# Altium PCB PCB1.PcbDoc (part 1 of 10)
Units mm, origin at the board's own origin, x right, y up, seen from the top; angles counter-clockwise.
Board outline 171.83 x 244.04 mm, 2 copper layers (Top Layer, Bottom Layer); 100 components, 186 nets, 878 pads, 221 vias.
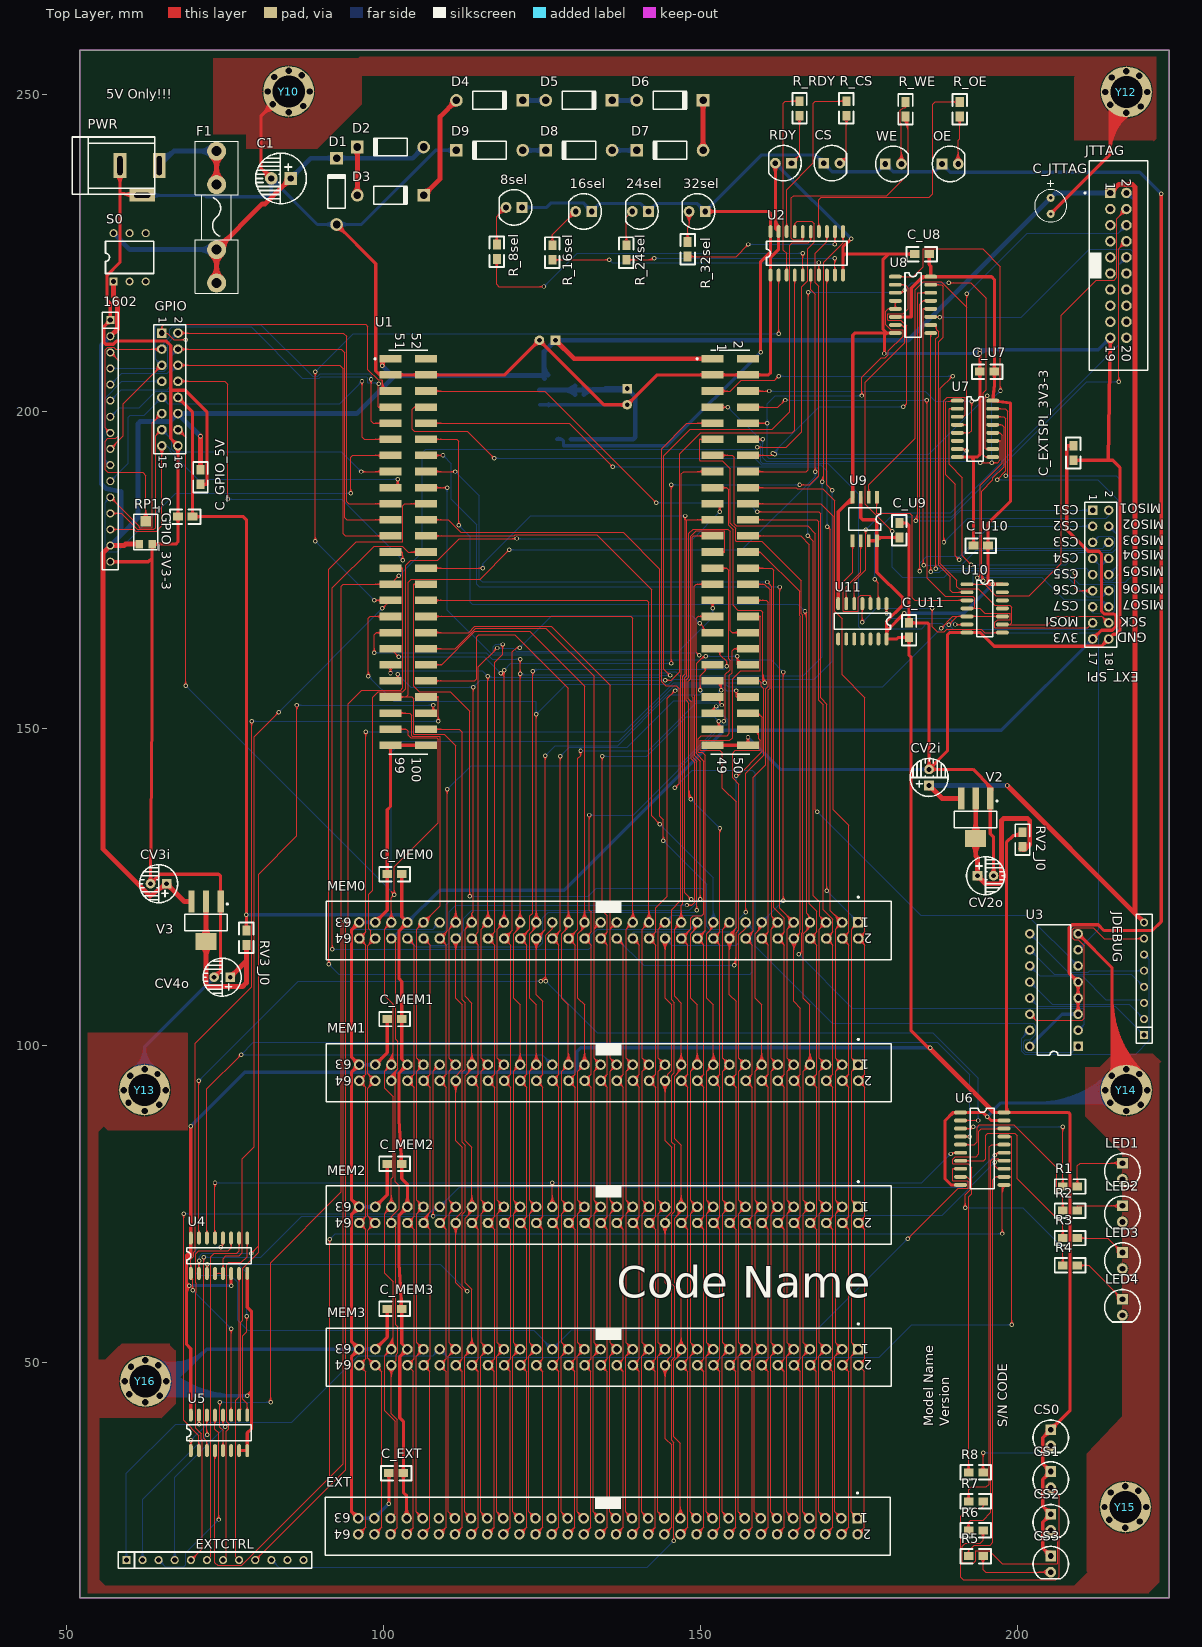
[diagram p0: Top Layer view]
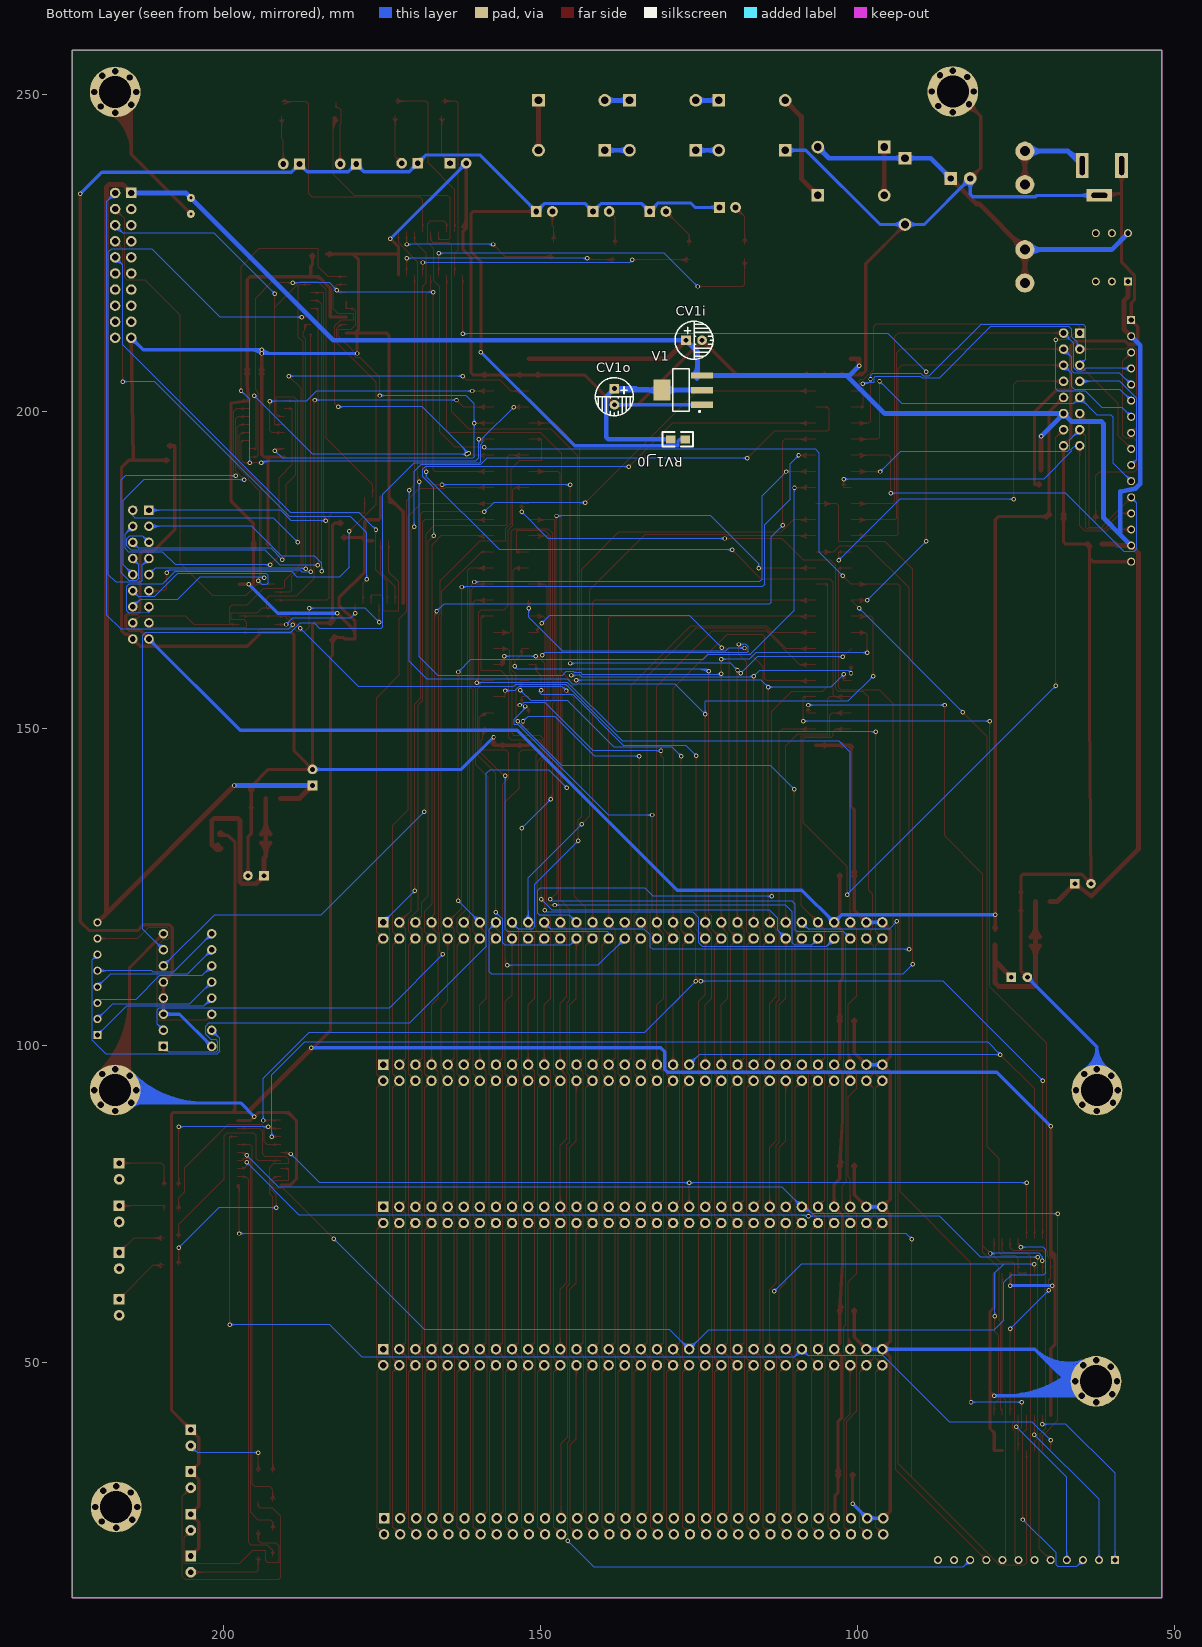
[diagram p1: Bottom Layer view, seen from below]

## Layer stack, top to bottom
Top Layer: signal copper 0.0356
Dielectric: dielectric 0.32, FR-4, Dk 4.8
Bottom Layer: signal copper 0.0356

## Board outline
52.07,256.921 223.901,256.921 223.901,12.885 52.07,12.885

## Design rules (kind name [scope] priority, off if disabled: settings)
Clearance [All] p1: gap=0.127
ComponentClearance [All] p1: gap=0.254 collisioncheckmode=3 verticalgap=0.254
HoleSize [All] p1: absolutevalues=TRUE maxlimit=15 minlimit=0.025 maxpercent=80.000 minpercent=20.000
PolygonConnect [All] p1: connectstyle=Relief reliefconductorwidth=0.254 reliefentries=4 polygonreliefangle="90 Angle"
RoutingVias [All] p1: holewidth=0.4 width=0.7 viastyle="Through Hole" minholewidth=0.4 minwidth=0.7 maxholewidth=0.4 maxwidth=0.7
SMDToCorner [All] p1: distance=150000
SolderMaskExpansion [All] p1: expansion=0.102
TestPointUsage [All] p1: valid=0 allowmultiple=FALSE
Testpoint [All] p1: side=15 testpointundercomponent=TRUE minsize=1.016 maxsize=2.54 preferedsize=1.524 minholesize=0 maxholesize=1.016 preferedholesize=0.813 testpointgrid=0.025 style=1023 order=0123456789
Width Width_2 [(InNet('3V3-1') OR InNet('3V3-2') OR InNet('3V3-3'))] p1: maxlimit=0.508 minlimit=0.254 preferedwidth=0.508
Width Width_1 [InNet('NetD2_2') OR InNet('NetD3_2') OR InNet('NetD4_2') OR InNet('NetD5_2') OR InNet('NetD6_2') OR InNet('NetD7_2') OR InNet('NetD8_2') OR InNet('NetF1_2') OR InNet('NetC1_1') OR InNet('NetCV1o_1') OR InNet('NetCV2o_1') OR InNet('NetCV4o_1')] p2: maxlimit=0.762 minlimit=0.254 preferedwidth=0.762
Width Width_PWR5 [InNet('+5')] p3: maxlimit=0.762 minlimit=0.254 preferedwidth=0.762
Width Width_GND [InNet('GND')] p4: maxlimit=5 minlimit=0.152 preferedwidth=0.508
Width [All] p5: maxlimit=0.508 minlimit=0.152 preferedwidth=0.152
17 further rules are at their usual default settings.

## Classes and differential pairs
component class CPU&POWER: 8sel 16sel 24sel 32sel C1 CS CV1i CV1o CV2i CV2o CV3i CV4o D1 D2 D3 D4 D5 D6 D7 D8 D9 DC5V F1 JDEBUG OE PWR R_8sel R_16sel R_24sel R_32sel R_CS R_OE R_RDY R_WE RDY RV1_J0 RV2_J0 RV3_J0 S0 U1 U2 U3 V1 V2 V3 WE
component class EXT_SLOT: C_EXT C_MEM0 C_MEM1 C_MEM2 C_MEM3 CS0 CS1 CS2 CS3 EXT EXTCTRL LED1 LED2 LED3 LED4 MEM0 MEM1 MEM2 MEM3 R1 R2 R3 R4 R5 R6 R7 R8 U4 U5 U6
component class SPI_IO: 1602 C_EXTSPI_3V3-3 C_GPIO_3V3-3 C_GPIO_5V C_JTTAG C_U7 C_U8 C_U9 C_U10 C_U11 EXT_SPI GPIO JTTAG RP1 U7 U8 U9 U10 U11

## Components (designator, comment, footprint, x,y, rotation, side; value= is the part's Value field where it differs from the comment)
8sel "红色" "LED 5MM-Y" 120.575,232.156 r180 top
16sel "红色" "LED 5MM-YC" 131.557,231.521 r180 top
24sel "红色" "LED 5MM-YC" 140.507,231.521 r180 top
32sel "红色" "LED 5MM-YC" 149.457,231.521 r180 top
1602 "HDR-1X16" SIP16 56.896,214.376 r270 top
C1 "100uF/25V" CAP3.0 85.344,236.728 r0 top
C_EXT "Cap" 0805 100.838,32.512 r0 top
C_EXTSPI_3V3-3 "104" 0805 208.788,194.564 r270 top
C_GPIO_3V3-3 "104" 0805 67.564,183.388 r0 top
C_GPIO_5V "104" 0805 71.12,188.468 r90 top
C_JTTAG "10uF/16V" RB.1/.2 205.232,231.14 r90 top
C_MEM0 "Cap" 0805 100.584,127 r0 top
C_MEM1 "Cap" 0805 100.584,104.14 r0 top
C_MEM2 "Cap" 0805 100.584,81.28 r0 top
C_MEM3 "Cap" 0805 100.584,58.42 r0 top
C_U7 "104" 0805 194.056,206.248 r0 top
C_U8 "104" 0805 183.769,224.79 r0 top
C_U9 "104" 0805 181.356,182.372 r270 top
C_U10 "104" 0805 193.04,178.816 r0 top
C_U11 "104" 0805 182.88,166.624 r270 top
CS "红色" "LED 5MM-B" 170.695,239.141 r0 top
CS0 "红色" "LED 5MM-B" 205.232,38.1 r270 top
CS1 "红色" "LED 5MM-B" 205.232,31.496 r270 top
CS2 "红色" "LED 5MM-B" 205.232,24.765 r270 top
CS3 "红色" "LED 5MM-B" 205.232,18.161 r270 top
CV1i "10uF/16V" CAP2.54M 127.127,211.201 r180 bottom
CV1o "10uF/16V" CAP2.54M 138.43,203.581 r270 bottom
CV2i "10uF/16V" CAP2.54M 186.044,140.964 r90 top
CV2o "10uF/16V" CAP2.54M 193.664,126.74 r0 top
CV3i "10uF/16V" CAP2.54M 65.786,125.487 r180 top
CV4o "10uF/16V" CAP2.54M 75.819,110.744 r180 top
D1 "1N4007" DO-41 92.583,234.696 r90 top
D2 "1N4007" DO-41 101.092,241.681 r180 top
D3 "1N4007" DO-41 101.092,234.061 r0 top
D4 "1N4007" DO-41 116.713,249.047 r0 top
D5 "1N4007" DO-41 130.81,249.047 r0 top
D6 "1N4007" DO-41 145.161,249.047 r0 top
D7 "1N4007" DO-41 145.161,241.173 r180 top
D8 "1N4007" DO-41 130.81,241.173 r180 top
D9 "1N4007" DO-41 116.713,241.173 r180 top
EXT "Header 2X32" IDC2.54-V64D 135.382,24.13 r180 top
EXT_SPI "Header 9X2" HDR2X9 211.836,184.404 r270 top
EXTCTRL "HDR-1X12" SIP12 59.436,18.796 r0 top
F1 "5x20/2A" "FU 5x20" 73.66,230.632 r90 top
GPIO "Header 8X2" HDR2X8 65.024,212.344 r270 top
JDEBUG "CON8" SIP8 219.964,101.6 r90 top
JTTAG "Header 2X10" IDC2.54-V20D 215.9,223.012 r270 top
LED1 "红色" "LED 5MM-B" 216.535,80.137 r270 top
LED2 "红色" "LED 5MM-B" 216.535,73.406 r270 top
LED3 "红色" "LED 5MM-B" 216.535,66.04 r270 top
LED4 "红色" "LED 5MM-B" 216.535,58.674 r270 top
MEM0 "Header 2X32" IDC2.54-V64D 135.509,118.11 r180 top
MEM1 "Header 2X32" IDC2.54-V64D 135.509,95.673 r180 top
MEM2 "Header 2X32" IDC2.54-V64D 135.509,73.237 r180 top
MEM3 "Header 2X32" IDC2.54-V64D 135.509,50.8 r180 top
OE "红色" "LED 5MM-B" 189.357,239.014 r0 top
PWR "DC5V" DC-005 58.42,238.76 r180 top
R1 "1K" 0805 207.137,77.724 r0 top
R2 "1K" 0805 207.137,73.914 r0 top
R3 "1K" 0805 207.137,69.596 r0 top
R4 "1K" 0805 207.137,65.278 r0 top
R5 "1K" 0805 192.278,19.431 r0 top
R6 "1K" 0805 192.278,23.495 r0 top
R7 "1K" 0805 192.278,28.067 r0 top
R8 "1K" 0805 192.278,32.639 r0 top
R_8sel "1K" 0805 117.856,224.028 r90 top
R_16sel "1K" 0805 126.619,223.901 r90 top
R_24sel "1K" 0805 138.303,223.901 r90 top
R_32sel "1K" 0805 147.955,224.409 r90 top
R_CS "1K" 0805 173.006,248.92 r270 top
R_OE "1K" 0805 190.881,248.793 r270 top
R_RDY "1K" 0805 165.608,248.92 r270 top
R_WE "1K" 0805 182.324,246.507 r90 top
RDY "红色" "LED 5MM-B" 163.068,239.141 r180 top
RP1 "5K" 3303W 62.484,180.848 r0 top
RV1_J0 "0" 0805 129.54,195.58 r180 bottom
RV2_J0 "0" 0805 200.776,131.312 r90 top
RV3_J0 "0" 0805 78.359,115.824 r90 top
S0 "SW-SPST" DIP6 57.404,220.472 r90 top
U1 "XC7S15BRD" XC7S15BRD 102.616,186.944 r0 top
U2 "74LS244" SOJ-20 161.036,221.488 r90 top
U3 "74LS47" DIP-16 205.74,108.712 r90 top
U4 "74ALS138" SO-16 69.596,64.008 r90 top
U5 "74HC151" SO-16 69.596,36.068 r90 top
U6 "74LS244" SOJ-20 191.008,89.408 r0 top
U7 "74HC151" SO-16 190.5,201.676 r0 top
U8 "74ALS138" SO-16 180.721,221.234 r0 top
U9 "W25Qxx" SOIC-8 177.8,186.436 r270 top
U10 "74LS08" SO-14 192.024,172.72 r0 top
U11 "74LS32" SO-14 179.324,169.672 r270 top
V1 "AMS1117-3V3" SOT-223_手工焊接 124.587,201.041 r0 bottom
V2 "AMS1117-3V3" SOT-223_手工焊接 195.696,138.932 r270 top
V3 "AMS1117-3V3" SOT-223_手工焊接 74.295,122.682 r270 top
WE "红色" "LED 5MM-B" 180.407,239.014 r0 top
Y10 "MTHOLE9" MTHOLE9 85.025,250.441 r90 top
Y12 "MTHOLE9" MTHOLE9 217.165,250.362 r90 top
Y13 "MTHOLE9" MTHOLE9 62.304,92.934 r90 top
Y14 "MTHOLE9" MTHOLE9 217.165,92.934 r90 top
Y15 "MTHOLE9" MTHOLE9 217.009,27.171 r90 top
Y16 "MTHOLE9" MTHOLE9 62.44,47.002 r90 top

## Footprints (in the part's own frame and the unit in brackets; to place one, negate y for a bottom-side part, rotate by r counter-clockwise, add the part's x,y. Pads: shape width x height; smd on the part's side, far side on the other; paste and mask are expansions set on the pad)
0805 [mil]
  rect 60x50 smd: 1(0,0) 2(90,0)
  silkscreen extent -50,-45 140,45
3303W [mm] "3.5*3.1*1.5mm"
  rect 1.2x1.3 smd: 1(-1,-1.8) 3(1,-1.8)
  rect 1.7x1.6 smd: 2(0,1.8)
  silkscreen extent -1.9,-2.7 1.9,2.9, body extent -1.55,-2.06 1.55,2.05, height 1.45
CAP2.54M [mil] "6mm*8mm"
  rect 60x60 hole 30: 1(0.42,0.23)
  round 60 hole 30: 2(100.42,0.23)
  silkscreen extent -68,-118 169,118
CAP3.0 [mm] "100V 10uF"
  rect 2x2 hole 1: 1(0,0)
  round 2 hole 1: 2(-3.048,0)
  silkscreen extent -5.52,-4 2.48,4
DC-005 [mm] "5.5*2.1mm，DC30V,2.5A"
  rect 2x4 hole 0.8 slot 3 at 90 deg: 1(-6.2,0) 2(0,0)
  rect 4x2 hole 0.8 slot 2.5 at 0 deg: 3(-3.5,4.7)
  silkscreen extent -5.48,-4.5 7.5,4.5, body extent -6.55,-4.5 7.5,4.8, height 11.2
DIP6 [mil]
  rect 50x50 hole 32: 1(0,0)
  round 50 hole 32: 2(0,-100) 3(0,-200) 4(300,-200) 5(300,-100) 6(300,0)
  silkscreen extent 50,-250 250,50
DIP-16 [mm] "DIP; 16 Leads; Row Spacing 7.62 mm; Pitch 2.54 mm"
  rect 1.5x1.5 hole 0.9: 1(-8.89,-3.81)
  round 1.5 hole 0.9: 2(-6.35,-3.81) 3(-3.81,-3.81) 4(-1.27,-3.81) 5(1.27,-3.81) 6(3.81,-3.81) 7(6.35,-3.81) 8(8.89,-3.81) 9(8.89,3.81) 10(6.35,3.81) 11(3.81,3.81) 12(1.27,3.81) 13(-1.27,3.81) 14(-3.81,3.81) 15(-6.35,3.81) 16(-8.89,3.81)
  silkscreen extent -10.3,-2.65 10.3,2.65
DO-41 [mm] "Diode, Axial; Body 5.2 x 2.7 mm (LxDia. max), Lead Dia. 0.86 mm (max)"
  round 2 hole 1.2: 1(-5.23,0)
  rect 2x2 hole 1.2: 2(5.23,0)
  silkscreen extent -2.65,-1.41 2.75,1.4
"FU 5x20" [mm] "5*20保险管底座夹子"
  round 3 hole 1.6: 1(-10.4,0) 1(-5.13,0) 2(5.13,0) 2(10.4,0)
  silkscreen extent -12,-3.38 12,3.38, body extent -10.8,-3.15 10.8,3.15, height 9.77
HDR2X8 [mm] "Connector; Header; 8x2 Position"
  rect 1.5x1.5 hole 0.9: 1(0,0)
  round 1.5 hole 0.9: 2(0,2.54) 3(2.54,0) 4(2.54,2.54) 5(5.08,0) 6(5.08,2.54) 7(7.62,0) 8(7.62,2.54) 9(10.16,0) 10(10.16,2.54) 11(12.7,0) 12(12.7,2.54) 13(15.24,0) 14(15.24,2.54) 15(17.78,0) 16(17.78,2.54)
  silkscreen extent -1.27,-1.27 19.05,3.81
HDR2X9 [mm] "Connector; Header; 9x2 Position"
  rect 1.5x1.5 hole 0.9: 1(0,0)
  round 1.5 hole 0.9: 2(0,2.54) 3(2.54,0) 4(2.54,2.54) 5(5.08,0) 6(5.08,2.54) 7(7.62,0) 8(7.62,2.54) 9(10.16,0) 10(10.16,2.54) 11(12.7,0) 12(12.7,2.54) 13(15.24,0) 14(15.24,2.54) 15(17.78,0) 16(17.78,2.54) 17(20.32,0) 18(20.32,2.54)
  silkscreen extent -1.27,-1.27 21.59,3.81
IDC2.54-V20D [mm] "Connector; IDC, Low Profile Male Header, Thru-Hole; 20 Position; Vertical; Pitch 2.54 mm; Body 33.02 x 9.2 x 9.45 mm (LxWxH)"
  rect 1.65x1.65 hole 1: 1(-11.43,-1.27)
  round 1.65 hole 1: 2(-11.43,1.27) 3(-8.89,-1.27) 4(-8.89,1.27) 5(-6.35,-1.27) 6(-6.35,1.27) 7(-3.81,-1.27) 8(-3.81,1.27) 9(-1.27,-1.27) 10(-1.27,1.27) 11(1.27,-1.27) 12(1.27,1.27) 13(3.81,-1.27) 14(3.81,1.27) 15(6.35,-1.27) 16(6.35,1.27) 17(8.89,-1.27) 18(8.89,1.27) 19(11.43,-1.27) 20(11.43,1.27)
  silkscreen extent -16.51,-5.37 16.51,4.6
IDC2.54-V64D [mm] "Connector; IDC, Low Profile Male Header, Thru-Hole; 64 Position; Vertical; Pitch 2.54 mm; Body 89.10 x 9.2 x 9.45 mm (LxWxH)"
  rect 1.65x1.65 hole 1: 1(-39.37,-1.27)
  round 1.65 hole 1: 2(-39.37,1.27) 3(-36.83,-1.27) 4(-36.83,1.27) 5(-34.29,-1.27) 6(-34.29,1.27) 7(-31.75,-1.27) 8(-31.75,1.27) 9(-29.21,-1.27) 10(-29.21,1.27) 11(-26.67,-1.27) 12(-26.67,1.27) 13(-24.13,-1.27) 14(-24.13,1.27) 15(-21.59,-1.27) 16(-21.59,1.27) 17(-19.05,-1.27) 18(-19.05,1.27) 19(-16.51,-1.27) 20(-16.51,1.27) 21(-13.97,-1.27) 22(-13.97,1.27) 23(-11.43,-1.27) 24(-11.43,1.27) 25(-8.89,-1.27) 26(-8.89,1.27) 27(-6.35,-1.27) 28(-6.35,1.27) 29(-3.81,-1.27) 30(-3.81,1.27) 31(-1.27,-1.27) 32(-1.27,1.27) 33(1.27,-1.27) 34(1.27,1.27) 35(3.81,-1.27) 36(3.81,1.27) 37(6.35,-1.27) 38(6.35,1.27) 39(8.89,-1.27) 40(8.89,1.27) 41(11.43,-1.27) 42(11.43,1.27) 43(13.97,-1.27) 44(13.97,1.27) 45(16.51,-1.27) 46(16.51,1.27) 47(19.05,-1.27) 48(19.05,1.27) 49(21.59,-1.27) 50(21.59,1.27) 51(24.13,-1.27) 52(24.13,1.27) 53(26.67,-1.27) 54(26.67,1.27) 55(29.21,-1.27) 56(29.21,1.27) 57(31.75,-1.27) 58(31.75,1.27) 59(34.29,-1.27) 60(34.29,1.27) 61(36.83,-1.27) 62(36.83,1.27) 63(39.37,-1.27) 64(39.37,1.27)
  silkscreen extent -44.55,-5.37 44.55,4.6
"LED 5MM-B" [mm] "蓝色5mm直插LED"
  rect 1.7x1.7 hole 0.9: 1(-1.27,0)
  round 1.7 hole 0.9: 2(1.27,0)
  silkscreen extent -2.8,-2.8 2.33,2.8, body extent -2.85,-2.85 2.45,2.85, height 8.75
"LED 5MM-Y" [mm] "黄色5mm直插LED"
  rect 1.7x1.7 hole 0.9: 1(-1.27,0)
  round 1.7 hole 0.9: 2(1.27,0)
  silkscreen extent -2.8,-2.8 2.33,2.8, body extent -2.85,-2.85 2.45,2.85, height 8.75
"LED 5MM-YC" [mm] "橙色5mm直插LED"
  rect 1.7x1.7 hole 0.9: 1(-1.27,0)
  round 1.7 hole 0.9: 2(1.27,0)
  silkscreen extent -2.8,-2.8 2.33,2.8, body extent -2.85,-2.85 2.45,2.85, height 8.75
MTHOLE9 [mil]
  round 315 hole 200: 1(0,0)
  round 50 hole 40: 2(0,130) 3(0,-130) 4(-130,0) 5(130,0) 6(90,90) 7(-90,-90) 8(-80,100) 9(100,-80)
RB.1/.2 [mm]
  round 1.27 hole 0.5: 1(2.53,0.01) 2(-0.01,0.01)
  silkscreen extent -1.28,-2.53 5.32,2.55, body extent -2.07,-3.34 4.35,3.08, height 11.7
SIP8 [mil]
  rect 50x50 hole 32: 1(0,0)
  round 50 hole 32: 2(100,0) 3(200,0) 4(300,0) 5(400,0) 6(500,0) 7(600,0) 8(700,0)
  silkscreen extent -50,-50 750,50
SIP12 [mil]
  rect 50x50 hole 32: 1(0,0)
  round 50 hole 32: 2(100,0) 3(200,0) 4(300,0) 5(400,0) 6(500,0) 7(600,0) 8(700,0) 9(800,0) 10(900,0) 11(1000,0) 12(1100,0)
  silkscreen extent -50,-50 1150,50
SIP16 [mil]
  rect 50x50 hole 32: 1(0,0)
  round 50 hole 32: 2(100,0) 3(200,0) 4(300,0) 5(400,0) 6(500,0) 7(600,0) 8(700,0) 9(800,0) 10(900,0) 11(1000,0) 12(1100,0) 13(1200,0) 14(1300,0) 15(1400,0) 16(1500,0)
  silkscreen extent -50,-50 1550,50
SO-14 [mil]
  oval 80x24 smd: 1(0,0) 2(0,-50) 3(0,-100) 4(0,-150) 5(0,-200) 6(0,-250) 7(0,-300) 8(220,-300) 9(220,-250) 10(220,-200) 11(220,-150) 12(220,-100) 13(220,-50) 14(220,0)
  silkscreen extent 60,-325 160,25
SO-16 [mil]
  oval 80x24 smd: 1(0,0) 2(0,-50) 3(0,-100) 4(0,-150) 5(0,-200) 6(0,-250) 7(0,-300) 8(0,-350) 9(220,-350) 10(220,-300) 11(220,-250) 12(220,-200) 13(220,-150) 14(220,-100) 15(220,-50) 16(220,0)
  silkscreen extent 60,-375 160,25
SOIC-8 [mil]
  rect 80x24 smd: 1(0,0) 2(0,-50.06) 3(0,-100.06) 4(0,-150.06) 5(270,-150) 6(270,-100) 7(270,-50) 8(270,0)
  silkscreen extent 65,-175 205,25
SOJ-20 [mil]
  oval 80x24 smd: 1(0,0) 2(0,-50) 3(0,-100) 4(0,-150) 5(0,-200) 6(0,-250) 7(0,-300) 8(0,-350) 9(0,-400) 10(0,-450) 11(270,-450) 12(270,-400) 13(270,-350) 14(270,-300) 15(270,-250) 16(270,-200) 17(270,-150) 18(270,-100) 19(270,-50) 20(270,0)
  silkscreen extent 60,-475 210,25
SOT-223_手工焊接 [mm] "SOT223, 4-Leads, Body 6.5x3.5mm, Pitch 2.3mm, Lead Span 7mm, IPC Low Density"
  rect 3.5x1 smd: 1(0,0) 2(0,-2.3) 3(0,-4.6)
  rect 2.7x3.3 smd: 4(6.3,-2.3)
  silkscreen extent 0.28,-5.65 4.65,1.17, body extent -0.4,-5.56 6.6,0.94, height 1.65
XC7S15BRD [mm]
  rect 3.5x1.2 smd: 1(49.276,21.336) 2(54.864,21.336) 3(49.276,18.796) 4(54.864,18.796) 5(49.276,16.256) 6(54.864,16.256) 7(49.276,13.716) 8(54.864,13.716) 9(49.276,11.176) 10(54.864,11.176) 11(49.276,8.636) 12(54.864,8.636) 13(49.276,6.096) 14(54.864,6.096) 15(49.276,3.556) 16(54.864,3.556) 17(49.276,1.016) 18(54.864,1.016) 19(49.276,-1.524) 20(54.864,-1.524) 21(49.276,-4.064) 22(54.864,-4.064) 23(49.276,-6.604) 24(54.864,-6.604) 25(49.276,-9.144) 26(54.864,-9.144) 27(49.276,-11.684) 28(54.864,-11.684) 29(49.276,-14.224) 30(54.864,-14.224) 31(49.276,-16.764) 32(54.864,-16.764) 33(49.276,-19.304) 34(54.864,-19.304) 35(49.276,-21.844) 36(54.864,-21.844) 37(49.276,-24.384) 38(54.864,-24.384) 39(49.276,-26.924) 40(54.864,-26.924) 41(49.276,-29.464) 42(54.864,-29.464) 43(49.276,-32.004) 44(54.864,-32.004) 45(49.276,-34.544) 46(54.864,-34.544) 47(49.276,-37.084) 48(54.864,-37.084) 49(49.276,-39.624) 50(54.864,-39.624) 51(-1.524,21.336) 52(4.064,21.336) 53(-1.524,18.796) 54(4.064,18.796) 55(-1.524,16.256) 56(4.064,16.256) 57(-1.524,13.716) 58(4.064,13.716) 59(-1.524,11.176) 60(4.064,11.176) 61(-1.524,8.636) 62(4.064,8.636) 63(-1.524,6.096) 64(4.064,6.096) 65(-1.524,3.556) 66(4.064,3.556) 67(-1.524,1.016) 68(4.064,1.016) 69(-1.524,-1.524) 70(4.064,-1.524) 71(-1.524,-4.064) 72(4.064,-4.064) 73(-1.524,-6.604) 74(4.064,-6.604) 75(-1.524,-9.144) 76(4.064,-9.144) 77(-1.524,-11.684) 78(4.064,-11.684) 79(-1.524,-14.224) 80(4.064,-14.224) 81(-1.524,-16.764) 82(4.064,-16.764) 83(-1.524,-19.304) 84(4.064,-19.304) 85(-1.524,-21.844) 86(4.064,-21.844) 87(-1.524,-24.384) 88(4.064,-24.384) 89(-1.524,-26.924) 90(4.064,-26.924) 91(-1.524,-29.464) 92(4.064,-29.464) 93(-1.524,-32.004) 94(4.064,-32.004) 95(-1.524,-34.544) 96(4.064,-34.544) 97(-1.524,-37.084) 98(4.064,-37.084) 99(-1.524,-39.624) 100(4.064,-39.624)
  silkscreen extent -4.08,-41 55.12,22.72

## Part data
8sel 16sel 24sel 32sel CS CS0 CS1 CS2 CS3 LED1 LED2 LED3 LED4 OE RDY WE: library part LED-5MM, "5mm插件LED"
1602: library part "Header 16", "16P接插件"
C1 C_JTTAG CV1i CV1o CV2i CV2o CV3i CV4o: library part C-CAP, "直插电解电容"
C_EXT C_MEM0 C_MEM1 C_MEM2 C_MEM3: "Capacitor"
C_EXTSPI_3V3-3 C_GPIO_3V3-3 C_GPIO_5V C_U7 C_U8 C_U9 C_U10 C_U11: library part C, "无极性贴片电容"
D1 D2 D3 D4 D5 D6 D7 D8 D9: "整流二极管"
EXT MEM0 MEM1 MEM2 MEM3: library part "Header 32X2", "32*2P接插件"
EXT_SPI: "9*2P接插件"
EXTCTRL: library part "Header 12", "12P接插件"
F1: library part "FU DIP", "直插保险丝"
GPIO: "8*2P接插件"
JDEBUG: "Connector"
JTTAG: library part "Header 10X2", "10*2P接插件"
PWR: library part P-DC, "低压电源接口"
R1 R2 R3 R4 R5 R6 R7 R8 R_8sel R_16sel R_24sel R_32sel R_CS R_OE R_RDY R_WE RV1_J0 RV2_J0 RV3_J0: library part R, "贴片电阻"
RP1: library part RP-SMD, "贴片电位器"
S0: "Single-Pole, Single-Throw Switch"
U9: "外置Flash"
V1 V2 V3: library part AMS1117, "三端稳压芯片"

## Via types
v1: diameter 0.7, hole 0.4, Top Layer to Bottom Layer, 221 vias

## Nets (pads, with @x,y where several pads share a name; then routed paths per layer and width w, separated by ;. In a path a pad name is that pad's centre, name@x,y a point inside that pad or via, vN(x,y) a via of type N, cw(c..) or ccw(c..) an arc to the next point about the centre after c; other vN are vias at no path point)
3V3-1: 8sel.1 16sel.1 24sel.1 32sel.1 CS.1 OE.1 RV1_J0.2 U2.20 U3.3 U3.4 U3.5 U3.16 WE.1 | length 384.2
  Top Layer w0.508: 32sel.1@150.727,231.521 160.655,231.521 161.036,231.14 U2.20@161.036,228.346 161.036,225.196 159.461,223.622 v1(159.461,209.347) ; 32sel.1@151.148,231.1 cw(c152.166,230.082) 152.166,231.521 cw(c152.166,232.96) 32sel.1@151.148,231.942 ; U3.5@209.054,109.982 ccw(c207.857,109.982) 208.703,110.829 ccw(c209.55,111.675) U3.5@209.55,110.478 ; U3.3@209.199,105.253 ccw(c208.353,106.099) 209.55,106.099 ccw(c210.747,106.099) U3.3@209.901,105.253 ; U3.4@209.199,107.091 cw(c208.353,106.245) 209.55,106.245 cw(c210.747,106.245) U3.4@209.901,107.091 ; U3.4@209.199,107.793 ccw(c208.353,108.639) 209.55,108.639 ccw(c210.747,108.639) U3.4@209.901,107.793 ; U3.5@209.199,109.631 cw(c208.353,108.785) 209.55,108.785 cw(c210.747,108.785) U3.5@209.901,109.631 ; U3.3@209.55,104.902 U3.4@209.55,107.442 U3.5@209.55,109.982 208.14,111.392 208.14,118.554 208.597,119.012 212.712,119.012 213.614,118.11 221.259,118.11 222.656,119.507 v1(222.656,234.315)
  Bottom Layer w0.508: 8sel.1@121.845,232.156 125.705,232.156 126.416,232.867 131.481,232.867 16sel.1@132.827,231.521 134.072,232.766 140.533,232.766 24sel.1@141.777,231.521 143.022,232.766 149.482,232.766 32sel.1@150.727,231.521 159.642,240.436 168.13,240.436 CS.1@169.425,239.141 170.772,237.795 177.918,237.795 WE.1@179.137,239.014 180.382,237.769 186.842,237.769 OE.1@188.087,239.014 189.382,237.719 219.253,237.719 v1(222.656,234.315) ; 8sel.1@122.267,231.735 cw(c123.284,230.717) 123.284,232.156 cw(c123.284,233.595) 8sel.1@122.267,232.577 ; RV1_J0.2@127.254,195.58 128.079,195.58 128.397,195.262 128.397,194.589 128.422,194.564 144.678,194.564 v1(159.461,209.347) ; RV1_J0.2@127.342,195.701 cw(c127.587,194.934) 128.156,195.503 ; 16sel.1@132.231,231.521 ccw(c130.792,231.521) 131.81,232.538 ccw(c132.827,233.556) 132.827,232.117 ccw(c132.827,233.556) 133.845,232.538 ccw(c134.862,231.521) 16sel.1@133.423,231.521 ; 24sel.1@141.181,231.521 ccw(c139.742,231.521) 140.76,232.538 ccw(c141.777,233.556) 141.777,232.117 ccw(c141.777,233.556) 142.795,232.538 ccw(c143.812,231.521) 24sel.1@142.373,231.521 ; 32sel.1@150.131,231.521 ccw(c148.692,231.521) 149.709,232.538 ccw(c150.727,233.556) 150.727,232.117 ccw(c150.727,233.556) 151.744,232.538 ccw(c152.762,231.521) 32sel.1@151.323,231.521 ; CS.1@168.829,239.141 ccw(c167.391,239.141) 168.408,240.158 ccw(c169.425,241.176) CS.1@169.425,239.737 ; CS.1@169.425,238.545 cw(c169.425,237.106) 170.443,238.124 cw(c171.46,239.141) CS.1@170.021,239.141 ; WE.1@178.541,239.014 cw(c177.102,239.014) 178.12,237.997 cw(c179.137,236.979) 179.137,238.418 cw(c179.137,236.979) 180.155,237.997 cw(c181.172,239.014) WE.1@179.733,239.014 ; OE.1@187.491,239.014 cw(c186.052,239.014) 187.07,237.997 cw(c188.087,236.979) 188.087,238.418 cw(c188.087,236.979) 189.104,237.997 cw(c190.122,239.014) OE.1@188.683,239.014 ; U3.16@201.93,99.822 207.01,104.902 U3.3@209.55,104.902 ; U3.16@201.93,100.318 ccw(c201.93,101.515) 202.777,100.669 ccw(c203.623,99.822) U3.16@202.426,99.822 ; U3.3@209.199,104.551 ccw(c208.353,103.705) 208.353,104.902 ccw(c208.353,106.099) U3.3@209.199,105.253
3V3-2: C_U7.2 C_U8.2 C_U9.2 C_U10.2 C_U11.2 CS0.1 CS1.1 CS2.1 CS3.1 RV2_J0.2 U4.6 U4.16 U5.16 U6.20 U7.16 U8.6 U8.16 U9.3 U9.7 U9.8 U10.14 U11.14 | length 580.6
  Top Layer w0.508: 68.91,60.89 cw(c70.529,60.89) v1@69.384,62.035 ; 68.91,62.117 cw(c69.303,62.117) 69.025,62.394 ; v1(69.317,62.103) 68.91,62.509 ; U5.16@69.596,41.656 69.596,52.146 68.91,52.832 68.91,62.103 68.91,62.509 ; v1(69.596,87.249) U4.16@69.596,69.596 69.596,67.564 ; v1(75.946,62.103) U4.6@75.946,64.008 ; U9.3@175.258,186.436 175.258,183.197 175.576,182.88 177.482,182.88 177.8,182.562 U9.8@177.8,179.578 ; U9.7@176.53,179.578 U9.8@177.8,179.578 ; U9.8@177.836,180.325 ccw(c178.413,180.902) 178.413,180.086 ; U9.8@177.841,180.32 ccw(c178.308,180.67) 178.308,180.086 ; U11.14@179.375,164.795 cw(c180.785,164.795) 179.788,165.792 ; U8.6@180.721,214.884 183.197,214.884 183.236,214.922 183.236,219.418 185.052,221.234 U8.16@186.309,221.234 ; C_U9.2@181.087,179.817 ccw(c180.436,179.166) 180.436,180.086 ccw(c180.436,181.006) C_U9.2@181.087,180.355 ; C_U9.2@181.356,180.086 178.308,180.086 ; v1(182.143,168.148) 179.324,165.329 ; C_U11.2@182.611,163.942 cw(c181.96,163.291) 182.88,163.291 cw(c183.8,163.291) C_U11.2@183.149,163.942 ; C_U11.2@182.611,164.069 ccw(c181.96,163.418) 181.96,164.338 ccw(c181.96,165.258) C_U11.2@182.611,164.607 ; 184.579,220.761 cw(c185.598,219.742) U8.16@185.598,221.183 ; 184.779,220.961 cw(c185.38,220.36) U8.16@185.586,221.185 ; 185.496,100.02 ccw(c186.233,100.757) v1@186.233,99.715 ; C_U8.2@185.786,224.521 cw(c185.135,223.87) 186.055,223.87 cw(c186.975,223.87) C_U8.2@186.324,224.521 ; C_U8.2@186.055,224.79 186.055,223.139 186.309,222.885 U8.16@186.309,221.234 ; v1(186.233,99.619) 196.444,89.408 ; v1@186.329,99.619 ccw(c187.371,99.619) 186.634,98.882 ; C_U10.2@195.057,178.547 cw(c194.406,177.896) 195.326,177.896 cw(c196.246,177.896) C_U10.2@195.595,178.547 ; C_U10.2@195.057,179.085 ccw(c194.406,179.736) 195.326,179.736 ccw(c196.246,179.736) C_U10.2@195.595,179.085 ; C_U7.2@196.073,205.979 cw(c195.422,205.328) 196.342,205.328 cw(c197.262,205.328) C_U7.2@196.611,205.979 ; C_U7.2@196.073,206.517 ccw(c195.422,207.168) 196.342,207.168 ccw(c197.262,207.168) C_U7.2@196.611,206.517 ; U7.16@196.84,201.707 ccw(c197.198,201.979) 197.138,201.533 ; U10.14@197.612,172.72 v1(196.113,172.72) 195.478,172.72 195.326,172.872 C_U10.2@195.326,178.816 195.326,182.245 198.882,185.801 198.882,201.295 U7.16@196.088,201.676 196.342,204.216 C_U7.2@196.342,206.248 196.342,220.79 195.897,221.234 U8.16@186.309,221.234 ; 198.247,90.328 ccw(c199.497,90.328) U6.20@198.613,89.444 ; RV2_J0.2@200.264,133.071 ccw(c200.264,133.813) RV2_J0.2@200.882,133.401 ; RV2_J0.2@200.459,133.683 cw(c199.314,134.448) 199.314,133.071 ; RV2_J0.2@200.776,133.598 200.776,133.071 199.314,133.071 ; CS3.1@204.636,19.431 ccw(c203.197,19.431) 204.215,20.448 ccw(c205.232,21.466) CS3.1@205.232,20.027 ; CS0.1@204.636,39.37 cw(c203.197,39.37) 204.215,38.353 cw(c205.232,37.335) CS0.1@205.232,38.774 ; CS3.1@205.232,19.431 203.987,20.676 203.987,24.79 CS2.1@205.232,26.035 203.987,27.28 203.987,31.521 CS1.1@205.232,32.766 203.987,34.011 203.987,38.125 CS0.1@205.232,39.37 208.28,42.418 208.28,89.09 207.963,89.408 U6.20@198.247,89.408 ; CS2.1@205.232,25.439 ccw(c205.232,24) 204.215,25.018 ccw(c203.197,26.035) 204.636,26.035 ccw(c203.197,26.035) 204.215,27.052 ccw(c205.232,28.07) CS2.1@205.232,26.631 ; CS1.1@205.232,32.17 ccw(c205.232,30.731) 204.215,31.749 ccw(c203.197,32.766) 204.636,32.766 ccw(c203.197,32.766) 204.215,33.783 ccw(c205.232,34.801) CS1.1@205.232,33.362 ; CS0.1@205.232,39.966 ccw(c205.232,41.405) 206.249,40.387 ccw(c207.267,39.37) CS0.1@205.828,39.37 ; 68.91,62.509 68.91,66.192 ; 68.91,66.192 69.596,66.878 69.596,67.564 ; 68.91,66.192 68.91,66.878 69.596,67.564 ; U9.8@177.8,179.578 177.8,174.625 181.864,170.561 181.864,169.418 179.324,166.878 179.324,165.329 ; U9.8@177.8,179.578 178.308,180.086 ; 179.324,165.329 U11.14@179.324,164.084 180.975,164.084 181.229,164.338 C_U11.2@182.88,164.338 182.88,161.519 183.21,161.188 183.21,102.306 186.065,99.451 196.108,89.408 196.444,89.408 ; 196.444,89.408 U6.20@197.866,89.408 U6.20@198.247,89.408 ; U6.20@198.247,89.408 198.247,132.004 199.314,133.071
  Bottom Layer w0.508: v1(69.317,62.103) v1(75.946,62.103) ; v1(69.596,87.249) 78.08,95.733 130.01,95.733 130.48,96.203 130.48,98.984 131.115,99.619 v1(186.233,99.619) ; v1(182.143,168.148) 191.541,168.148 v1(196.113,172.72)
3V3-3: C_EXT.2 C_EXTSPI_3V3-3.1 C_GPIO_3V3-3.2 C_MEM0.2 C_MEM1.2 C_MEM2.2 C_MEM3.2 EXT.57 EXT_SPI.17 GPIO.10 MEM0.57 MEM1.57 MEM2.57 MEM3.57 RV3_J0.2 | length 431.7
  Top Layer w0.508: GPIO.10@67.564,201.688 cw(c67.564,200.491) 68.411,201.337 cw(c69.257,202.184) GPIO.10@68.06,202.184 ; GPIO.10@67.564,202.184 69.85,199.898 C_GPIO_3V3-3.2@69.85,183.388 77.851,183.388 78.359,182.88 v1(78.359,120.599) RV3_J0.2@78.359,118.11 ; C_GPIO_3V3-3.2@69.581,183.657 ccw(c68.93,184.308) 69.85,184.308 ccw(c70.77,184.308) C_GPIO_3V3-3.2@70.119,183.657 ; C_GPIO_3V3-3.2@70.246,183.119 cw(c70.897,182.468) 70.897,183.388 cw(c70.897,184.308) C_GPIO_3V3-3.2@70.246,183.657 ; RV3_J0.2@78.09,118.506 ccw(c77.439,119.157) 78.359,119.157 ccw(c79.279,119.157) RV3_J0.2@78.628,118.506 ; C_MEM2.2@102.457,81.532 ccw(c101.444,82.428) 102.794,82.511 ; C_MEM3.2@102.458,58.673 ccw(c101.446,59.57) 102.796,59.651 ; C_MEM3.2@102.601,58.151 cw(c101.95,57.5) 102.87,57.5 cw(c103.79,57.5) C_MEM3.2@103.139,58.151 ; C_MEM2.2@102.601,81.011 cw(c101.95,80.36) 102.87,80.36 cw(c103.79,80.36) C_MEM2.2@103.139,81.011 ; C_MEM1.2@102.601,103.871 cw(c101.95,103.22) 102.87,103.22 cw(c103.79,103.22) C_MEM1.2@103.139,103.871 ; C_MEM1.2@102.601,104.409 ccw(c101.95,105.06) 102.87,105.06 ccw(c103.79,105.06) C_MEM1.2@103.139,104.409 ; C_MEM0.2@102.601,126.731 cw(c101.95,126.08) 102.87,126.08 cw(c103.79,126.08) C_MEM0.2@103.139,126.731 ; C_EXT.2@102.855,32.243 cw(c102.204,31.592) 103.124,31.592 cw(c104.044,31.592) C_EXT.2@103.393,32.243 ; C_EXT.2@102.855,32.781 ccw(c102.204,33.432) 103.124,33.432 ccw(c104.044,33.432) C_EXT.2@103.393,32.781 ; C_MEM0.2@102.87,127 102.87,120.269 MEM0.57@103.759,119.38 102.438,118.059 102.438,110.49 102.87,110.058 C_MEM1.2@102.87,104.14 102.87,97.832 MEM1.57@103.759,96.943 102.438,95.623 102.438,88.265 C_MEM2.2@102.87,81.28 102.87,78.969 103.759,78.08 MEM2.57@103.759,74.507 102.438,73.186 102.438,65.634 C_MEM3.2@102.87,58.42 102.87,52.959 MEM3.57@103.759,52.07 102.54,50.851 102.54,41.25 103.124,40.665 C_EXT.2@103.124,32.512 103.124,29.464 103.632,28.956 EXT.57@103.632,25.4 ; MEM3.57@103.188,52.07 cw(c101.809,52.07) 102.784,51.095 cw(c103.759,50.12) MEM3.57@103.759,51.499 ; MEM2.57@103.188,74.507 cw(c101.809,74.507) 102.784,73.532 cw(c103.759,72.557) MEM2.57@103.759,73.936 ; MEM1.57@103.188,96.943 cw(c101.809,96.943) 102.784,95.969 cw(c103.759,94.994) MEM1.57@103.759,96.372 ; MEM0.57@103.188,119.38 cw(c101.809,119.38) 102.784,118.405 cw(c103.759,117.43) MEM0.57@103.759,118.809 ; EXT.57@103.228,25.804 ccw(c102.253,26.779) 103.632,26.779 ccw(c105.011,26.779) EXT.57@104.036,25.804 ; MEM2.57@103.355,74.91 ccw(c102.38,75.885) 103.759,75.885 ccw(c105.138,75.885) MEM2.57@104.163,74.91 ; C_EXTSPI_3V3-3.1@208.519,194.295 ccw(c207.868,193.644) 207.868,194.564 ccw(c207.868,195.484) C_EXTSPI_3V3-3.1@208.519,194.833 ; C_EXTSPI_3V3-3.1@208.788,194.564 207.797,194.564 207.772,194.539 207.772,181.292 211.137,177.927 212.788,177.927 213.233,177.482 213.233,168.477 213.677,168.033 215.229,168.033 215.507,167.755 215.507,166.053 214.935,165.481 213.233,165.481 EXT_SPI.17@211.836,164.084 ; EXT_SPI.17@211.836,164.58 ccw(c211.836,165.777) 212.683,164.931 ccw(c213.529,164.084) EXT_SPI.17@212.332,164.084
  Bottom Layer w0.508: v1(78.359,120.599) 102.54,120.599 MEM0.57@103.759,119.38 108.839,124.46 128.499,124.46 153.72,149.682 197.434,149.682 EXT_SPI.17@211.836,164.084 ; MEM0.57@103.188,119.38 ccw(c101.809,119.38) 102.784,120.355 ccw(c103.759,121.33) 103.759,119.951 ccw(c103.759,121.33) 104.734,120.355 ccw(c105.709,119.38) MEM0.57@104.33,119.38 ; EXT_SPI.17@211.34,164.084 cw(c210.143,164.084) 210.989,163.237 cw(c211.836,162.391) EXT_SPI.17@211.836,163.588
+5: 1602.2 1602.15 C_GPIO_5V.2 C_JTTAG.1 CV1i.1 CV2i.1 CV3i.1 GPIO.12 JDEBUG.8 JTTAG.1 RP1.1 S0.1 U1.1 U1.51 V1.3 V2.3 V3.3 | length 536.5
  Top Layer w0.762: 1602.2@56.896,211.836 58.039,212.979 58.039,217.42 57.404,218.055 S0.1@57.404,220.472 ; RP1.1@61.484,179.048 59.287,179.048 59.055,178.816 1602.15@56.896,178.816 55.753,177.673 55.753,130.921 63.167,123.507 CV3i.1@65.775,125.481 68.574,122.682 V3.3@69.695,122.682 ; CV3i.1@65.398,125.533 cw(c64.487,125.66) 65.042,124.926 cw(c65.597,124.192) CV3i.1@65.723,125.104 ; CV3i.1@65.775,125.1 cw(c65.775,124.18) 66.426,124.831 cw(c67.076,125.481) CV3i.1@66.156,125.481 ; C_GPIO_5V.2@71.12,190.754 v1(71.12,196.088) ; v1(99.822,207.175) 99.822,208.28 U1.51@101.092,208.28 ; v1@99.822,207.462 cw(c100.76,207.462) U1.51@100.097,208.125 ; CV1i.1@127.116,210.826 cw(c127.116,209.906) 127.767,210.556 cw(c128.417,211.207) CV1i.1@127.497,211.207 ; CV1i.1@127.116,211.207 130.043,208.28 U1.1@151.892,208.28 ; CV2i.1@186.038,140.594 cw(c186.038,139.674) 186.689,140.325 cw(c187.339,140.975) CV2i.1@186.419,140.975 ; CV2i.1@186.038,140.975 188.081,138.932 V2.3@191.096,138.932 ; v1(198.369,140.975) 218.516,120.828 ; JTTAG.1@214.63,234.442 215.976,235.788 218.123,235.788 218.516,235.394 218.516,120.828 ; JTTAG.1@214.63,234.886 ccw(c214.63,235.958) 215.388,235.2 ccw(c216.146,234.442) JTTAG.1@215.074,234.442 ; JDEBUG.8@219.964,119.38 218.516,120.828
  Bottom Layer w0.762: 1602.15@56.896,178.816 58.623,180.543 ; 1602.2@56.896,211.836 55.474,210.414 55.474,188.557 56.197,187.833 58.623,187.325 58.623,180.543 ; GPIO.12@67.195,199.644 cw(c66.304,199.644) 66.934,199.014 cw(c67.564,198.384) 67.564,199.275 cw(c67.564,198.384) 68.194,199.014 cw(c68.824,199.644) GPIO.12@67.933,199.644 ; GPIO.12@67.825,199.383 cw(c68.455,198.753) 68.455,199.644 cw(c68.455,200.535) GPIO.12@67.825,199.905 ; v1(71.12,196.088) GPIO.12@67.564,199.644 ; v1(99.822,207.175) 101.356,205.641 101.741,205.641 ; V1.3@125.324,205.328 ccw(c125.524,205.328) V1.3@125.382,205.186 ; 125.324,207.168 ccw(c127.364,207.168) V1.3@125.921,205.725 ; CV1i.1@126.735,211.207 cw(c125.815,211.207) 126.466,210.556 cw(c127.116,209.906) CV1i.1@127.116,210.826 ; CV1i.1@127.386,210.937 cw(c128.036,210.287) 128.036,211.207 cw(c128.036,212.127) CV1i.1@127.386,211.476 ; CV2i.1@186.038,140.975 v1(198.369,140.975) ; CV2i.1@186.308,140.706 cw(c186.958,140.055) 186.958,140.975 cw(c186.958,141.895) CV2i.1@186.308,141.244 ; JTTAG.1@214.316,234.128 ccw(c213.558,233.37) 213.558,234.442 ccw(c213.558,235.514) JTTAG.1@214.316,234.756 ; JTTAG.1@214.63,234.442 205.994,234.442 C_JTTAG.1@205.222,233.67 182.759,211.207 CV1i.1@127.116,211.207 125.324,209.414 125.324,205.641 V1.3@124.587,205.641 101.741,205.641 ; 58.623,180.543 61.265,183.185 61.265,198.044 61.595,198.374 66.294,198.374 GPIO.12@67.564,199.644 ; GPIO.12@67.564,199.644 95.744,199.644 101.741,205.641
/8SEL: EXT.47 MEM0.47 MEM1.47 MEM2.47 MEM3.47 U1.89 U2.15 | length 329.9
  Top Layer w0.152: U1.89@100.722,159.65 cw(c99.827,158.755) 101.092,158.755 cw(c102.357,158.755) U1.89@101.462,159.65 ; U1.89@100.829,159.757 cw(c100.195,159.123) 101.092,159.123 cw(c101.989,159.123) U1.89@101.355,159.757 ; v1@100.898,158.893 ccw(c100.431,159.36) 101.092,159.36 ccw(c101.753,159.36) v1@101.286,158.893 ; v1(101.092,158.699) U1.89@101.092,160.02 ; EXT.47@115.595,25.531 ccw(c114.606,25.706) 115.316,26.416 ; MEM3.47@115.713,52.008 cw(c114.347,51.896) 115.316,50.927 ; MEM3.47@115.719,52.186 ccw(c114.658,52.352) 115.418,53.111 ; MEM2.47@115.719,74.391 cw(c114.658,74.225) 115.418,73.465 ; MEM2.47@115.719,74.623 ccw(c114.658,74.789) 115.418,75.548 ; MEM1.47@115.719,96.827 cw(c114.658,96.661) 115.418,95.902 ; MEM1.47@115.719,97.059 ccw(c114.658,97.225) 115.418,97.985 ; MEM0.47@115.719,119.264 cw(c114.658,119.098) 115.418,118.339 ; EXT.47@115.745,25.504 ccw(c114.957,25.644) 115.523,26.209 ccw(c116.088,26.775) EXT.47@116.228,25.987 ; MEM3.47@115.865,52.021 cw(c114.777,51.931) 115.549,51.16 cw(c116.32,50.388) MEM3.47@116.41,51.476 ; MEM3.47@115.87,52.162 ccw(c115.025,52.295) 115.63,52.899 ccw(c116.234,53.504) MEM3.47@116.367,52.659 ; MEM2.47@115.87,74.414 cw(c115.025,74.282) 115.63,73.677 cw(c116.234,73.073) MEM2.47@116.367,73.917 ; MEM2.47@115.87,74.599 ccw(c115.025,74.731) 115.63,75.336 ccw(c116.234,75.941) MEM2.47@116.367,75.096 ; MEM1.47@115.87,96.851 cw(c115.025,96.719) 115.63,96.114 cw(c116.234,95.509) MEM1.47@116.367,96.354 ; MEM1.47@115.87,97.036 ccw(c115.025,97.168) 115.63,97.773 ccw(c116.234,98.377) MEM1.47@116.367,97.533 ; MEM0.47@115.87,119.288 cw(c115.025,119.155) 115.63,118.551 cw(c116.234,117.946) MEM0.47@116.367,118.791 ; EXT.47@115.895,25.478 ccw(c115.309,25.581) 115.73,26.002 ccw(c116.151,26.423) EXT.47@116.254,25.837 ; MEM0.47@115.93,119.909 ccw(c114.651,121.188) 116.459,121.188 ccw(c118.267,121.188) MEM0.47@116.988,119.909 ; MEM3.47@116.017,52.034 cw(c115.207,51.967) 115.781,51.392 cw(c116.356,50.818) MEM3.47@116.423,51.628 ; MEM3.47@116.02,52.139 ccw(c115.391,52.237) 115.842,52.687 ccw(c116.292,53.138) MEM3.47@116.39,52.509 ; MEM2.47@116.02,74.438 cw(c115.391,74.339) 115.842,73.889 cw(c116.292,73.439) MEM2.47@116.39,74.068 ; MEM2.47@116.02,74.575 ccw(c115.391,74.674) 115.842,75.124 ccw(c116.292,75.574) MEM2.47@116.39,74.945 ; MEM1.47@116.02,96.875 cw(c115.391,96.776) 115.842,96.326 cw(c116.292,95.876) MEM1.47@116.39,96.505 ; MEM1.47@116.02,97.012 ccw(c115.391,97.111) 115.842,97.561 ccw(c116.292,98.011) MEM1.47@116.39,97.382 ; MEM0.47@116.02,119.311 cw(c115.391,119.213) 115.842,118.763 cw(c116.292,118.312) MEM0.47@116.39,118.941 ; MEM0.47@116.037,119.802 ccw(c115.019,120.82) 116.459,120.82 ccw(c117.899,120.82) MEM0.47@116.881,119.802 ; MEM0.47@116.145,119.694 ccw(c115.387,120.452) 116.459,120.452 ccw(c117.531,120.452) MEM0.47@116.773,119.694 ; EXT.47@116.201,26.137 cw(c116.026,27.126) 115.316,26.416 ; v1@116.265,157.998 cw(c115.798,157.53) 116.459,157.53 cw(c117.12,157.53) v1@116.653,157.998 ; EXT.47@116.332,25.4 115.316,26.416 ; MEM3.47@116.343,52.81 cw(c116.177,53.871) 115.418,53.111 ; MEM2.47@116.343,73.767 ccw(c116.177,72.706) 115.418,73.465 ; MEM2.47@116.343,75.246 cw(c116.177,76.307) 115.418,75.548 ; MEM1.47@116.343,96.204 ccw(c116.177,95.143) 115.418,95.902 ; MEM1.47@116.343,97.683 cw(c116.177,98.744) 115.418,97.985 ; MEM0.47@116.343,118.64 ccw(c116.177,117.579) 115.418,118.339 ; MEM3.47@116.397,51.324 ccw(c116.285,49.958) 115.316,50.927 ; v1(116.459,158.191) MEM0.47@116.459,119.38 115.418,118.339 ; v1@144.938,158.331 ccw(c144.277,158.331) 144.744,158.798 ccw(c145.212,159.266) v1@145.212,158.605 ; v1(145.212,158.331) 144.201,159.341 144.201,193.02 148.361,197.18 161.341,197.18 164.084,199.923 164.084,226.187 164.465,226.568 167.005,226.568 167.386,226.949 U2.15@167.386,228.346 ; U2.15@167.224,227.473 cw(c166.834,227.083) 167.386,227.083 cw(c167.938,227.083) U2.15@167.548,227.473 ; 115.316,26.416 115.316,50.927 ; 115.316,50.927 MEM3.47@116.459,52.07 115.418,53.111 ; 115.418,53.111 115.418,73.465 ; 115.418,73.465 MEM2.47@116.459,74.507 115.418,75.548 ; 115.418,75.548 115.418,95.902 ; 115.418,95.902 MEM1.47@116.459,96.943 115.418,97.985 ; 115.418,97.985 115.418,118.339
  Bottom Layer w0.152: v1(101.092,158.699) 101.467,159.075 ; v1@101.137,158.969 ccw(c101.2,159.342) 101.467,159.075 ; v1@101.362,158.745 cw(c101.735,158.807) 101.467,159.075 ; v1@116.185,158.191 ccw(c115.524,158.191) 115.992,158.659 ccw(c116.459,159.126) v1@116.459,158.465 ; v1@116.437,158.169 ccw(c116.813,158.546) 116.813,158.013 ; v1@116.545,158.277 ccw(c117.181,158.914) 117.181,158.013 ; v1@116.653,158.385 ccw(c117.549,159.281) 117.549,158.013 ; v1@145.018,158.137 ccw(c144.551,157.67) 144.551,158.331 ccw(c144.551,158.992) v1@145.018,158.525 ; v1(145.212,158.331) 143.809,158.331 143.492,158.013 116.637,158.013 v1(116.459,158.191) 115.576,159.075 101.467,159.075
/16SEL: EXT.45 MEM0.45 MEM1.45 MEM2.45 MEM3.45 U1.87 U2.13 | length 334.7
  Top Layer w0.152: U1.87@101.092,162.56 v1(102.362,161.29) ; v1@102.088,161.29 ccw(c101.427,161.29) 101.895,161.757 ccw(c102.362,162.225) v1@102.362,161.564 ; EXT.45@118.135,25.531 ccw(c117.146,25.706) 117.856,26.416 ; MEM3.45@118.253,52.008 cw(c116.887,51.896) 117.856,50.927 ; MEM3.45@118.259,52.186 ccw(c117.198,52.352) 117.958,53.111 ; MEM2.45@118.259,74.391 cw(c117.198,74.225) 117.958,73.465 ; MEM2.45@118.259,74.623 ccw(c117.198,74.789) 117.958,75.548 ; MEM1.45@118.259,96.827 cw(c117.198,96.661) 117.958,95.902 ; MEM1.45@118.259,97.059 ccw(c117.198,97.225) 117.958,97.985 ; MEM0.45@118.259,119.264 cw(c117.198,119.098) 117.958,118.339 ; EXT.45@118.285,25.504 ccw(c117.497,25.644) 118.063,26.209 ccw(c118.628,26.775) EXT.45@118.768,25.987 ; MEM3.45@118.405,52.021 cw(c117.317,51.931) 118.089,51.16 cw(c118.86,50.388) MEM3.45@118.95,51.476 ; MEM3.45@118.41,52.162 ccw(c117.565,52.295) 118.17,52.899 ccw(c118.774,53.504) MEM3.45@118.907,52.659 ; MEM2.45@118.41,74.414 cw(c117.565,74.282) 118.17,73.677 cw(c118.774,73.073) MEM2.45@118.907,73.917 ; MEM2.45@118.41,74.599 ccw(c117.565,74.731) 118.17,75.336 ccw(c118.774,75.941) MEM2.45@118.907,75.096 ; MEM1.45@118.41,96.851 cw(c117.565,96.719) 118.17,96.114 cw(c118.774,95.509) MEM1.45@118.907,96.354 ; MEM1.45@118.41,97.036 ccw(c117.565,97.168) 118.17,97.773 ccw(c118.774,98.377) MEM1.45@118.907,97.533 ; MEM0.45@118.41,119.288 cw(c117.565,119.155) 118.17,118.551 cw(c118.774,117.946) MEM0.45@118.907,118.791 ; EXT.45@118.435,25.478 ccw(c117.849,25.581) 118.27,26.002 ccw(c118.691,26.423) EXT.45@118.794,25.837 ; MEM0.45@118.47,119.909 ccw(c117.191,121.188) 118.999,121.188 ccw(c120.807,121.188) MEM0.45@119.528,119.909 ; v1@118.478,158.4 cw(c118.478,157.739) 118.946,158.206 cw(c119.413,158.674) v1@118.752,158.674 ; v1(118.478,158.674) 118.999,158.153 ; MEM3.45@118.557,52.034 cw(c117.747,51.967) 118.321,51.392 cw(c118.896,50.818) MEM3.45@118.963,51.628 ; MEM3.45@118.56,52.139 ccw(c117.931,52.237) 118.382,52.687 ccw(c118.832,53.138) MEM3.45@118.93,52.509 ; MEM2.45@118.56,74.438 cw(c117.931,74.339) 118.382,73.889 cw(c118.832,73.439) MEM2.45@118.93,74.068 ; MEM2.45@118.56,74.575 ccw(c117.931,74.674) 118.382,75.124 ccw(c118.832,75.574) MEM2.45@118.93,74.945 ; MEM1.45@118.56,96.875 cw(c117.931,96.776) 118.382,96.326 cw(c118.832,95.876) MEM1.45@118.93,96.505 ; MEM1.45@118.56,97.012 ccw(c117.931,97.111) 118.382,97.561 ccw(c118.832,98.011) MEM1.45@118.93,97.382 ; MEM0.45@118.56,119.311 cw(c117.931,119.213) 118.382,118.763 cw(c118.832,118.312) MEM0.45@118.93,118.941 ; MEM0.45@118.577,119.802 ccw(c117.559,120.82) 118.999,120.82 ccw(c120.439,120.82) MEM0.45@119.421,119.802 ; MEM0.45@118.685,119.694 ccw(c117.927,120.452) 118.999,120.452 ccw(c120.071,120.452) MEM0.45@119.313,119.694 ; EXT.45@118.741,26.137 cw(c118.566,27.126) 117.856,26.416 ; v1@118.805,158.988 cw(c118.338,158.521) 118.999,158.521 cw(c119.66,158.521) v1@119.193,158.988 ; EXT.45@118.872,25.4 117.856,26.416 ; MEM3.45@118.883,52.81 cw(c118.717,53.871) 117.958,53.111 ; MEM2.45@118.883,73.767 ccw(c118.717,72.706) 117.958,73.465 ; MEM2.45@118.883,75.246 cw(c118.717,76.307) 117.958,75.548 ; MEM1.45@118.883,96.204 ccw(c118.717,95.143) 117.958,95.902 ; MEM1.45@118.883,97.683 cw(c118.717,98.744) 117.958,97.985 ; MEM0.45@118.883,118.64 ccw(c118.717,117.579) 117.958,118.339 ; MEM3.45@118.937,51.324 ccw(c118.825,49.958) 117.856,50.927 ; v1(118.999,159.182) 118.999,158.153 ; v1@145.196,160.417 ccw(c144.729,160.884) 145.39,160.884 ccw(c146.051,160.884) v1@145.583,160.417 ; v1@145.196,188.198 cw(c144.729,187.731) 145.39,187.731 cw(c146.051,187.731) v1@145.583,188.198 ; v1(145.39,160.223) v1(145.39,188.392) ; v1(165.608,188.392) 167.239,188.392 168.656,189.809 168.656,219.71 168.097,220.269 168.097,224.917 169.926,226.746 U2.13@169.926,228.346 ; v1@165.802,188.198 cw(c166.269,187.731) 166.269,188.392 cw(c166.269,189.053) v1@165.802,188.585 ; U2.13@169.764,227.473 cw(c169.374,227.083) 169.926,227.083 cw(c170.478,227.083) U2.13@170.088,227.473 ; 117.856,26.416 117.856,50.927 ; 117.856,50.927 MEM3.45@118.999,52.07 117.958,53.111 ; 117.958,53.111 117.958,73.465 ; 117.958,73.465 MEM2.45@118.999,74.507 117.958,75.548 ; 117.958,75.548 117.958,95.902 ; 117.958,95.902 MEM1.45@118.999,96.943 117.958,97.985 ; 117.958,97.985 117.958,118.339 ; 117.958,118.339 MEM0.45@118.999,119.38 118.999,158.153
  Bottom Layer w0.152: v1(102.362,161.29) 115.862,161.29 v1(118.478,158.674) ; v1@102.556,161.096 cw(c103.023,160.629) 103.023,161.29 cw(c103.023,161.951) v1@102.556,161.484 ; v1@118.205,158.674 ccw(c117.543,158.674) 118.011,159.141 ccw(c118.478,159.609) v1@118.478,158.948 ; v1(118.999,159.182) 120.04,160.223 v1(145.39,160.223) ; v1@118.999,159.456 ccw(c118.999,160.117) 119.466,159.649 ccw(c119.934,159.182) v1@119.273,159.182 ; v1@145.196,160.03 ccw(c144.729,159.562) 144.729,160.223 ccw(c144.729,160.884) v1@145.196,160.417 ; v1(145.39,188.392) v1(165.608,188.392) ; v1@145.583,188.198 cw(c146.051,187.731) 146.051,188.392 cw(c146.051,189.053) v1@145.583,188.585 ; v1@165.414,188.198 ccw(c164.947,187.731) 164.947,188.392 ccw(c164.947,189.053) v1@165.414,188.585
/24SEL: EXT.43 MEM0.43 MEM1.43 MEM2.43 MEM3.43 U1.85 U2.11 | length 348.9
  Top Layer w0.152: v1@98.333,162.119 ccw(c97.866,162.586) 98.527,162.586 ccw(c99.188,162.586) v1@98.72,162.119 ; v1(98.527,161.925) 98.527,164.782 98.844,165.1 ; U1.85@99.535,164.77 ccw(c98.844,164.211) 98.844,165.1 ; U1.85@99.535,165.43 cw(c98.844,165.989) 98.844,165.1 ; U1.85@99.653,164.866 ccw(c99.164,164.47) 99.164,165.1 ccw(c99.164,165.73) U1.85@99.653,165.334 ; U1.85@101.092,165.1 98.844,165.1 ; EXT.43@120.675,25.531 ccw(c119.686,25.706) 120.396,26.416 ; MEM3.43@120.793,52.008 cw(c119.427,51.896) 120.396,50.927 ; MEM3.43@120.799,52.186 ccw(c119.738,52.352) 120.498,53.111 ; MEM2.43@120.799,74.391 cw(c119.738,74.225) 120.498,73.465 ; MEM2.43@120.799,74.623 ccw(c119.738,74.789) 120.498,75.548 ; MEM1.43@120.799,96.827 cw(c119.738,96.661) 120.498,95.902 ; EXT.43@120.825,25.504 ccw(c120.037,25.644) 120.603,26.209 ccw(c121.168,26.775) EXT.43@121.308,25.987 ; 120.879,117.958 ccw(c120.357,118.479) MEM0.43@120.944,118.926 ; MEM3.43@120.945,52.021 cw(c119.857,51.931) 120.629,51.16 cw(c121.4,50.388) MEM3.43@121.49,51.476 ; MEM3.43@120.95,52.162 ccw(c120.105,52.295) 120.71,52.899 ccw(c121.314,53.504) MEM3.43@121.447,52.659 ; MEM2.43@120.95,74.414 cw(c120.105,74.282) 120.71,73.677 cw(c121.314,73.073) MEM2.43@121.447,73.917 ; MEM2.43@120.95,74.599 ccw(c120.105,74.731) 120.71,75.336 ccw(c121.314,75.941) MEM2.43@121.447,75.096 ; MEM1.43@120.95,96.851 cw(c120.105,96.719) 120.71,96.114 cw(c121.314,95.509) MEM1.43@121.447,96.354 ; EXT.43@120.975,25.478 ccw(c120.389,25.581) 120.81,26.002 ccw(c121.231,26.423) EXT.43@121.334,25.837 ; 121.002,118.081 ccw(c120.497,118.586) MEM0.43@121.065,119.018 ; MEM1.43@121.01,97.473 ccw(c119.731,98.751) 121.539,98.751 ccw(c123.347,98.751) MEM1.43@122.068,97.473 ; MEM0.43@121.01,119.909 ccw(c119.731,121.188) 121.539,121.188 ccw(c123.347,121.188) MEM0.43@122.068,119.909 ; MEM3.43@121.097,52.034 cw(c120.287,51.967) 120.861,51.392 cw(c121.436,50.818) MEM3.43@121.503,51.628 ; MEM3.43@121.1,52.139 ccw(c120.471,52.237) 120.922,52.687 ccw(c121.372,53.138) MEM3.43@121.47,52.509 ; MEM2.43@121.1,74.438 cw(c120.471,74.339) 120.922,73.889 cw(c121.372,73.439) MEM2.43@121.47,74.068 ; MEM2.43@121.1,74.575 ccw(c120.471,74.674) 120.922,75.124 ccw(c121.372,75.574) MEM2.43@121.47,74.945 ; MEM1.43@121.1,96.875 cw(c120.471,96.776) 120.922,96.326 cw(c121.372,95.876) MEM1.43@121.47,96.505 ; MEM1.43@121.117,97.365 ccw(c120.099,98.383) 121.539,98.383 ccw(c122.979,98.383) MEM1.43@121.961,97.365 ; MEM0.43@121.117,119.802 ccw(c120.099,120.82) 121.539,120.82 ccw(c122.979,120.82) MEM0.43@121.961,119.802 ; 121.125,118.204 ccw(c120.637,118.692) MEM0.43@121.186,119.111 ; MEM1.43@121.225,97.257 ccw(c120.467,98.015) 121.539,98.015 ccw(c122.611,98.015) MEM1.43@121.853,97.257 ; MEM0.43@121.225,119.694 ccw(c120.467,120.452) 121.539,120.452 ccw(c122.611,120.452) MEM0.43@121.853,119.694 ; 121.248,118.327 ccw(c120.777,118.799) MEM0.43@121.307,119.203 ; EXT.43@121.281,26.137 cw(c121.106,27.126) 120.396,26.416 ; v1@121.345,158.385 cw(c120.878,157.917) 121.539,157.917 cw(c122.2,157.917) v1@121.733,158.385 ; v1@121.345,158.772 ccw(c120.878,159.24) 121.539,159.24 ccw(c122.2,159.24) v1@121.733,158.772 ; v1@121.345,160.715 cw(c120.878,160.248) 121.539,160.248 cw(c122.2,160.248) v1@121.733,160.715 ; 121.372,118.451 ccw(c120.917,118.906) MEM0.43@121.428,119.296 ; EXT.43@121.412,25.4 120.396,26.416 ; MEM3.43@121.423,52.81 cw(c121.257,53.871) 120.498,53.111 ; MEM2.43@121.423,73.767 ccw(c121.257,72.706) 120.498,73.465 ; MEM2.43@121.423,75.246 cw(c121.257,76.307) 120.498,75.548 ; MEM1.43@121.423,96.204 ccw(c121.257,95.143) 120.498,95.902 ; MEM3.43@121.477,51.324 ccw(c121.365,49.958) 120.396,50.927 ; v1(121.539,160.909) v1(121.539,158.578) MEM0.43@121.539,119.38 121.539,118.618 120.498,117.577 120.498,107.417 121.539,106.375 MEM1.43@121.539,96.943 120.498,95.902 ; v1@168.983,189.068 ccw(c167.933,190.118) 169.418,190.118 ; v1@169.091,188.96 ccw(c168.301,189.75) 169.418,189.75 ; v1(169.177,188.874) 169.418,189.116 169.418,223.545 172.466,226.593 U2.11@172.466,228.346 ; v1@169.199,188.852 ccw(c168.669,189.382) 169.418,189.382 ; U2.11@172.304,227.473 cw(c171.914,227.083) 172.466,227.083 cw(c173.018,227.083) U2.11@172.628,227.473 ; 120.396,26.416 120.396,50.927 ; 120.396,50.927 MEM3.43@121.539,52.07 120.498,53.111 ; 120.498,53.111 120.498,73.465 ; 120.498,73.465 MEM2.43@121.539,74.507 120.498,75.548 ; 120.498,75.548 120.498,95.902
  Bottom Layer w0.152: v1(98.527,161.925) 116.154,161.925 117.17,160.909 v1(121.539,160.909) ; v1@98.72,161.731 cw(c99.188,161.264) 99.188,161.925 cw(c99.188,162.586) v1@98.72,162.119 ; v1@121.345,160.715 ccw(c120.878,160.248) 120.878,160.909 ccw(c120.878,161.57) v1@121.345,161.103 ; v1(121.539,158.578) 121.649,158.468 143.382,158.468 143.645,158.732 144.659,158.732 144.811,158.884 146.083,158.884 146.648,158.318 166.185,158.318 169.177,161.31 v1(169.177,188.874) ; v1@121.625,158.664 ccw(c122.098,159.138) 122.098,158.468 ; v1@121.733,158.385 cw(c121.934,158.184) 121.934,158.468 ; v1@121.733,158.772 ccw(c122.466,159.506) 122.466,158.468 ; v1@168.983,188.681 cw(c168.516,188.213) 169.177,188.213 cw(c169.838,188.213) v1@169.37,188.681